# Altium PCB Micron-6_00_small border.PcbDoc
Units mm, origin at the board's own origin, x right, y up, seen from the top; angles counter-clockwise.
Board outline 41.92 x 18.62 mm, 2 copper layers (Top Layer, Bottom Layer), stack 1.571 mm thick; 74 components, 56 nets, 244 pads, 88 vias.
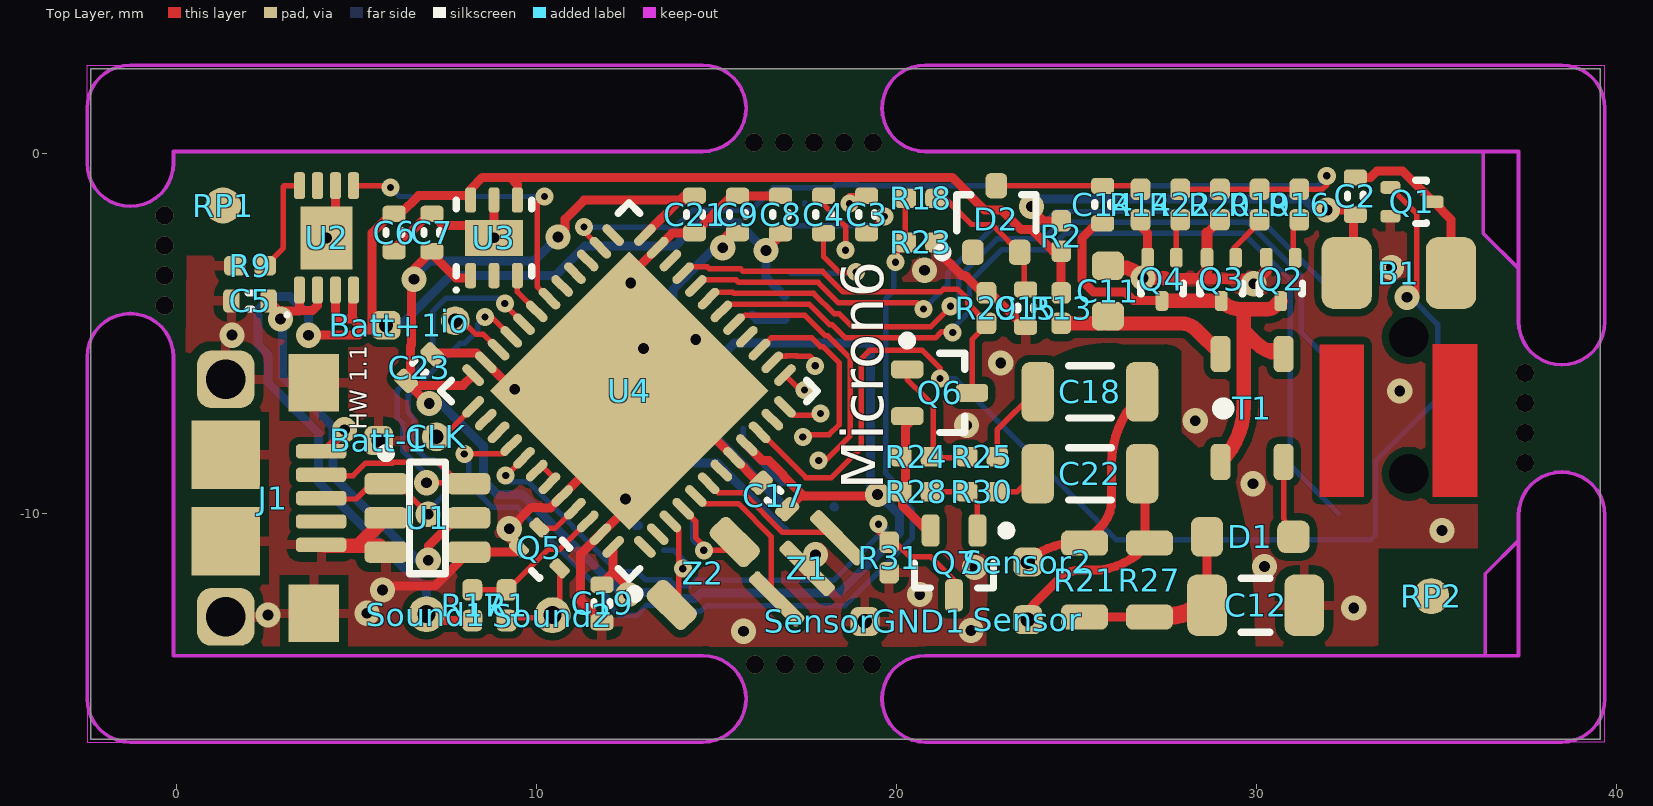
[diagram p0: Top Layer view]
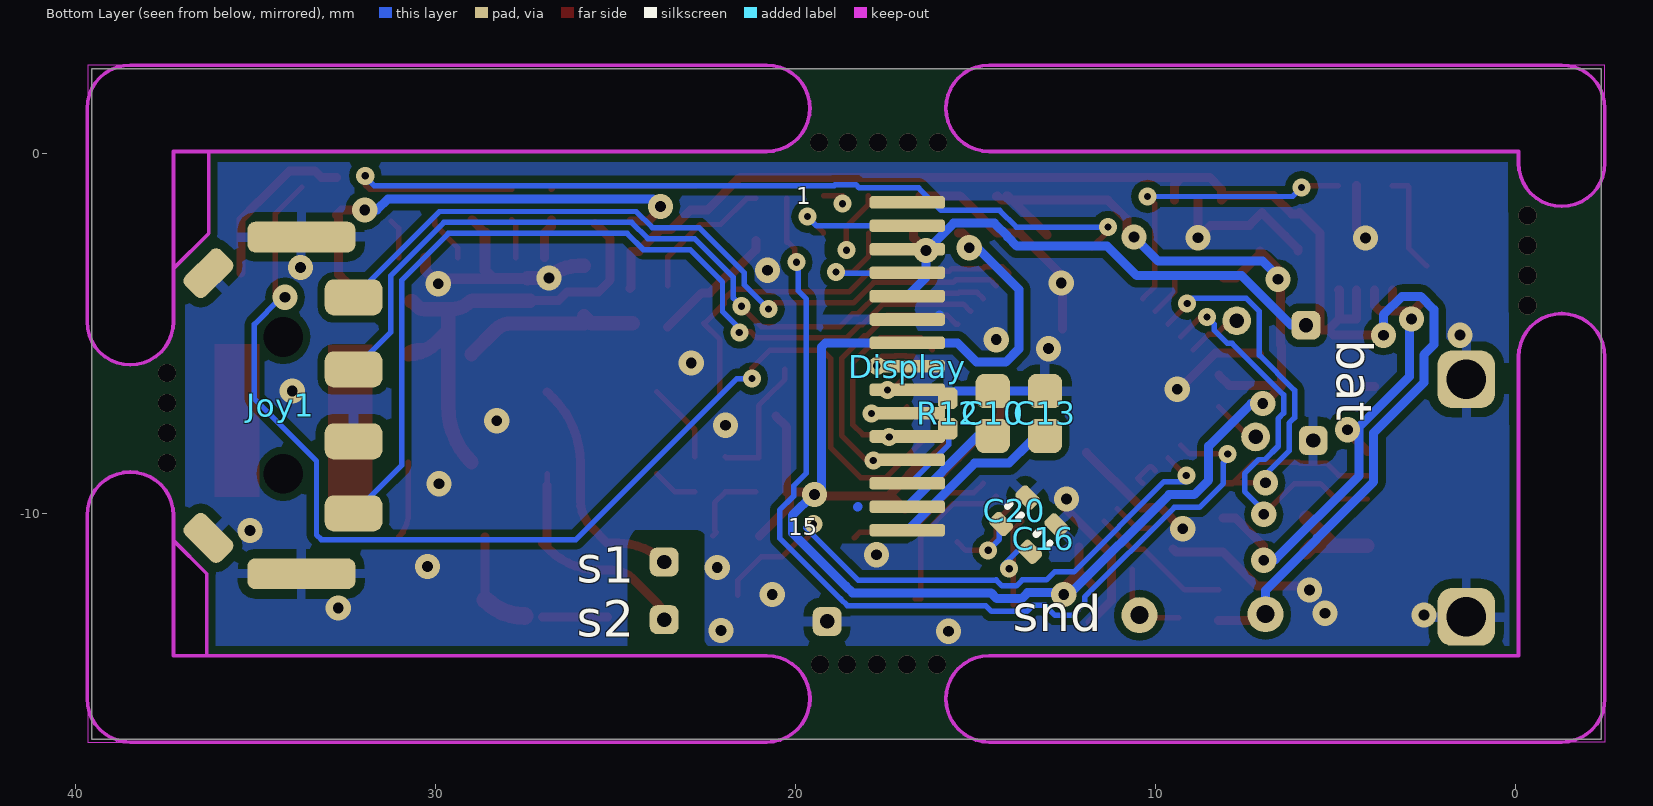
[diagram p1: Bottom Layer view, seen from below]

## Layer stack, top to bottom
Top Solder: solder mask 0.0102, Solder Resist, Dk 3.5
Top Layer: signal copper 0.0356
Dielectric1: dielectric 1.5, FR-4, Dk 4.8
Bottom Layer: signal copper 0.0356
Bottom Solder: solder mask 0.0102, Solder Resist, Dk 3.5

## Board outline
-2.375,-16.275 39.55,-16.275 39.55,2.35 -2.375,2.35
cut-out: 20.775,0.05 cw(c20.775,1.25) 20.775,2.45 39.65,2.45 39.65,-4.675 cw(c38.45,-4.675) 37.25,-4.675 37.25,-3.175 36.3,-2.225 36.3,0.05
cut-out: 20.775,-16.35 cw(c20.775,-15.15) 20.775,-13.95 36.35,-13.95 36.35,-11.675 37.25,-10.775 37.25,-10.05 cw(c38.45,-10.05) 39.65,-10.05 39.65,-16.35
cut-out: -2.475,-16.35 14.625,-16.35 ccw(c14.625,-15.15) 14.625,-13.95 -0.075,-13.95 -0.075,-5.65 ccw(c-1.275,-5.65) -2.475,-5.65
cut-out: -2.475,-0.275 -2.475,2.45 14.625,2.45 cw(c14.625,1.25) 14.625,0.05 -0.075,0.05 -0.075,-0.275 cw(c-1.275,-0.275)

## Design rules (kind name [scope] priority, off if disabled: settings)
BoardOutlineClearance [All] p1: gap=0.25
Clearance Clearance_NetD2_1 [InNet('NetD2_1')] p1: gap=0.3
Clearance Clearance_NetC1_2 [InNet('NetC1_2')] p2: gap=0.3
Clearance Clearance_NetC1_1 [InNet('NetC1_1')] p3: gap=0.2
Clearance Clearance_400V [InNet('+400V')] p4: gap=0.5
Clearance Clearance_poly [InPolygon] p5: gap=0.2
Clearance [All] p6: gap=0.152
ComponentClearance ComponentClearance_bot [OnLayer('Bottom Layer') and not (InComponent('Joy1') or InComponent('Display'))] p1: gap=0.5 collisioncheckmode=3 verticalgap=0.1 showdistances=TRUE
ComponentClearance [All] p2: gap=0.4 collisioncheckmode=3 verticalgap=0.1 showdistances=TRUE
HoleSize HoleSize_pw_ [InNet('pw_*') or InNet('GND')] p1: absolutevalues=TRUE maxlimit=2.54 minlimit=0.3 maxpercent=80.000 minpercent=20.000
HoleSize [All] p2: absolutevalues=TRUE maxlimit=2.54 minlimit=0.2 maxpercent=80.000 minpercent=20.000
HoleToHoleClearance [All] p1: gap=0.152 allowstackedmicrovias=TRUE
MinimumAnnularRing MinimumAnnularRing_pw_ [InNet('pw_*') or InNet('GND')] p1: minimumring=0.2
MinimumAnnularRing [InNet('*')] p2: minimumring=0.1
MinimumSolderMaskSliver [All] p1: minsoldermaskwidth=0.152
PlaneClearance [All] p1: clearance=2
PlaneConnect [All] p1: planeconnectstyle=Relief reliefexpansion=0.457 reliefentries=4 reliefconductorwidth=0.3 reliefairgap=0.457
PolygonConnect PolygonConnect_via [IsVia] p1: connectstyle=Direct reliefconductorwidth=0.254 reliefentries=4 polygonreliefangle="90 Angle" airgapwidth=0.254
PolygonConnect [All] p2: connectstyle=Relief reliefconductorwidth=0.254 reliefentries=4 polygonreliefangle="90 Angle" airgapwidth=0.254
RoutingVias [All] p1: holewidth=0.3 width=0.62 viastyle="Through Hole" minholewidth=0.3 minwidth=0.62 maxholewidth=6 maxwidth=4
ShortCircuit ShortCircuit_1 [All] p1: allowed=FALSE
ShortCircuit [All] p2: allowed=FALSE
SilkToSilkClearance [All] p1: silktosilkclearance=0.152
SilkToSolderMaskClearance SilkscreenOverComponentPads [IsPad] p1: minsilkscreentomaskgap=0.1 clearancetoexposedcopper=TRUE
SolderMaskExpansion [All] p1: expansion=0.05
Width Width_pw_ [InNet('pw_*') or InNet('GND')] p1: maxlimit=2.254 minlimit=0.25 preferedwidth=0.25
Width [All] p2: maxlimit=2.254 minlimit=0.152 preferedwidth=0.152
21 further rules are at their usual default settings.

## Components (designator, comment, footprint, x,y, rotation, side; value= is the part's Value field where it differs from the comment)
B1 "Vibro" "VIBRO 4HOBBY" 36.3,-9.725 r90 top
Batt+1 "" "SENSOR CONTACT"#1 6.2,-3 r270 top
Batt-1 "" "Sensor contact" 5.625,-7.975 r0 top
C2 "1uF" "0402 AVX CHK2" 32.742,-1.189 r270 top
C3 "1uF" "0402 AVX CHK2" 19.175,-1.7 r270 top
C4 "1uF" "0402 AVX CHK2" 17.98,-1.7 r270 top
C5 "1uF" "0402 AVX CHK2" 2.05,-4.1 r0 top
C6 "1uF" "0402 AVX CHK2" 6.05,-2.2 r90 top
C7 "1uF" "0402 AVX CHK2" 7.1,-2.2 r270 top
C8 "1uF" "0402 AVX CHK2" 16.784,-1.7 r270 top
C9 "1uF" "0402 AVX CHK2" 15.589,-1.7 r90 top
C10 "2.2uF" "YEGEO 0603" 14.525,-7.225 r90 bottom
C11 "10uF" 1608[0603] 25.875,-3.825 r270 top
C12 "4.7nF 630V" C1206 29.975,-12.55 r180 top
C13 "2.2uF" "YEGEO 0603" 13.075,-7.225 r90 bottom
C14 "10nF" "0402 AVX CHK2" 25.727,-1.425 r90 top
C15 "220pF" "0402 AVX CHK2" 23.587,-4.3 r270 top
C16 "10pF" "0402 AVX CHK2" 13.125,-10.7 r315 bottom
C17 "100nF" "0402 AVX CHK2" 16.6,-9.515 r135 top
C18 "10pF" CC1206JRNPOBBN100 25.375,-6.625 r0 top
C19 "100nF" "0402 AVX CHK2" 11.825,-12.5 r270 top
C20 "10pF" "0402 AVX CHK2" 13.925,-9.925 r315 bottom
C21 "100nF" "0402 AVX CHK2" 14.393,-1.7 r270 top
C22 "10pF" CC1206JRNPOBBN100 25.375,-8.9 r0 top
C23 "100nF" "0402 AVX CHK2" 6.75,-5.95 r45 top
CLK "" "SENSOR CONTACT"#2 7.225,-7.875 r180 top
D1 "DA2JF8100L" DA2JF8100L(CHK) 29.825,-10.65 r0 top
D2 "BAV99W" BAV99W 22.775,-1.825 r90 top
Display "UG-2832HSWEG04" "UG-2832HSWEG04 - DUPLICATE" 16.81,-5.925 r0 bottom locked
io "" "SENSOR CONTACT"#2 7.75,-4.65 r0 top
J1 "Micro-USB" 10118193-0001LF 1.375,-9.575 r270 top locked
Joy1 "SLLB510100" SLLB510100 33.225,-7 r90 bottom locked
Q1 "RUM002N05T2L" RUM002N05 34.317,-1.349 r0 top
Q2 "RUM002N05T2L" RUM002N05 30.675,-3.505 r270 top
Q3 "RUM002N05T2L" RUM002N05 29.025,-3.505 r270 top
Q4 "RUM002N05T2L" RUM002N05 27.375,-3.5 r270 top
Q5 "RUM002N05T2L" RUM002N05 10.225,-11.1 r315 top
Q6 "BC857CW" SOT323_L2 21.2,-6.65 r0 top
Q7 "BC857CW" SOT323_L2 21.6,-11.375 r270 top
R1 "150R" "0402 Yageo" 9.175,-12.55 r270 top
R2 "22R" "0402 Yageo" 24.575,-2.3 r90 top
R9 "20k" "0402 Yageo" 2.05,-3.125 r0 top
R12 "390K" "0402 Yageo" 15.775,-7.225 r270 bottom
R13 "22R" "0402 Yageo" 24.575,-4.3 r270 top
R14 "10k" "0402 Yageo" 26.779,-1.425 r90 top
R16 "470R" "0402 Yageo" 31.187,-1.425 r90 top
R17 "150R" "0402 Yageo" 8.225,-12.55 r90 top
R18 "196K" "0402 Yageo" 20.675,-1.25 r180 top
R19 "470R" "0402 Yageo" 30.085,-1.425 r90 top
R20 "10K" "0402 Yageo" 28.983,-1.425 r90 top
R21 "5.1M" "Vishay RCV0805" 25.225,-11.85 r270 top
R22 "470R" "0402 Yageo" 27.881,-1.425 r90 top
R23 "4.99k" "0402 Yageo" 20.675,-2.475 r0 top
R24 "470R" "0402 Yageo" 20.55,-8.425 r0 top
R25 "10k" "0402 Yageo" 22.375,-8.425 r180 top
R27 "5.1M" "VISHAY RCV0805" 27.025,-11.85 r270 top
R28 "470R" "0402 Yageo" 20.55,-9.4 r0 top
R29 "10k" "0402 Yageo" 22.5,-4.3 r90 top
R30 "10K" "0402 Yageo" 22.375,-9.4 r180 top
R31 "10k" "0402 Yageo" 19.8,-11.225 r270 top
RP1 "PR" "RP - minimum" 1.3,-1.45 r0 top
RP2 "PR" "RP - minimum" 34.85,-12.3 r90 top
Sensor "" "Sensor contact" 23.65,-12.95 r180 top
Sensor2 "" "Sensor contact" 23.65,-11.35 r90 top
SensorGND1 "" "Sensor contact" 19.125,-13 r0 top
Sound1 "" "SENSOR CONTACT"#3 6.95,-12.8 r90 top
Sound2 "" "SENSOR CONTACT"#3 10.45,-12.825 r90 top
T1 "ATB322515-0110" ATB322515-0110 30.75,-5.575 r270 top
U1 "USBLC6-4SC6" USBLC6-4 6.975,-10.125 r0 top
U2 "MCP73831-2ACI/MC" DFN-MC8 4.175,-2.35 r90 top
U3 "TPS780180300DRVT" TI-DRV6-1600X1000TP_V 8.825,-2.348 r90 top
U4 "STM32L152CBU6" STM32L152CBU6-SMALL 12.575,-6.6 r135 top
Z1 "CSTCE8M00G55-R0" CSTCE_G15C 17.522,-11.528 r225 top
Z2 "32,768 KHz" ABS07-120-32.768KHZ-T 14.675,-11.7 r45 top

## Footprints (in the part's own frame and the unit in brackets; to place one, negate y for a bottom-side part, rotate by r counter-clockwise, add the part's x,y. Pads: shape width x height; smd on the part's side, far side on the other; paste and mask are expansions set on the pad)
"0402 AVX CHK2" [mm]
  rrect50% 0.45x0.64 smd: 1(-0.52,0) 2(0.52,0)
  silkscreen extent -0.05,-0.22 0.05,0.22, body extent -0.55,-0.3 0.55,0.3, height 0.56
"0402 Yageo" [mm]
  rrect50% 0.6x0.55 smd: 1(-0.425,0) 2(0.425,0)
  body extent -0.53,-0.27 0.53,0.28, height 0.4
1608[0603] [mm] "Chip Capacitor, Body 1.6x0.8mm, IPC High Density"
  rrect50% 0.8x0.9 smd: 1(-0.7,0) 2(0.7,0)
  body extent -0.87,-0.48 0.87,0.48, height 1.3
10118193-0001LF [mm]
  rrect50% 0.4x1.4 smd: 1(-1.3,2.65) 2(-0.65,2.65) 3(0,2.65) 4(0.65,2.65) 5(1.3,2.65)
  rrect50% 1.6x1.6 hole 1.1: MH1(-3.3,0) MH1(3.3,0)
  rect 1.6x1.4 smd: MH1(-3.2,2.45) MH4(3.2,2.45)
  rect 1.9x1.9 smd: MH2(-1.2,0) MH3(1.2,0)
  body extent -3.93,-2.74 3.93,2.92, height 2.88
ABS07-120-32.768KHZ-T [mm]
  rrect50% 0.75x1.45 smd: 1(1.23,0.05) 2(-1.24,0.05)
  body extent -1.6,-0.7 1.6,0.8, height 0.9
ATB322515-0110 [mm]
  rrect50% 1x0.55 smd: 1(0,-1.75) 2(0,0) 3(3,0) 4(3,-1.75)
  silkscreen extent 1.5,-1.68 1.52,-1.66, body extent -0.1,-2.15 3.1,0.35, height 1.55
BAV99W [mm]
  rrect50% 0.7x0.6 smd: 1(-0.925,0.65) 2(-0.925,-0.65) 3(0.925,0)
  silkscreen extent -1.05,-1.1 0.67,1.62, body extent -1.12,-1.1 1.12,1.1, height 1.1
C1206 [mm] "Chip Capacitor, Body 3.2x1.6mm, IPC High Density"
  rrect50% 1.1x1.7 smd: 1(-1.35,0) 2(1.35,0)
  silkscreen extent -0.4,-0.75 0.4,0.75, body extent -1.6,-0.81 1.6,0.79, height 1.6
CC1206JRNPOBBN100 [mm]
  rrect50% 0.9x1.65 smd: 1(-1.45,0) 2(1.45,0)
  silkscreen extent -0.6,-0.72 0.6,0.72, body extent -1.75,-0.8 1.75,0.8, height 0.7
CSTCE_G15C [mm]
  rrect50% 0.4x1.9 smd: 1(-1.2,0) 2(1.2,0) 3(0,0)
  body extent -1.6,-0.65 1.6,0.65, height 0.7
DA2JF8100L(CHK) [mm] "SODFL, 2-Leads, Body 1,25x2,50mm, IPC Medium Density"
  rrect50% 0.9x1.1 smd: 1(-1.2,0)
  rrect50% 0.9x0.9 smd: 2(1.2,0)
  body extent -0.9,-0.67 0.9,0.67, height 0.8
DFN-MC8 [mm] "SON, 8-Leads, Body 2x3mm, Pitch 0.5mm, Microchip Recommended"
  rrect50% 0.75x0.3 smd: 1(-1.45,0.75) 2(-1.45,0.25) 3(-1.45,-0.25) 4(-1.45,-0.75) 5(1.45,-0.75) 6(1.45,-0.25) 7(1.45,0.25) 8(1.45,0.75)
  rect 1.75x1.45 smd: 9(0,0)
  silkscreen extent -2.18,1.05 -2.09,1.15, body extent -1.55,-1.05 1.55,1.05, height 1
"RP - minimum" [mm]
  round 1 smd paste-2 mask+0.5: 0(0,0)
RUM002N05 [mm] "SOTFL, 3-Leads, Body 1,20x1,20mm, Pitch 0,40mm, IPC Medium Density"
  rrect50% 0.55x0.35 smd: 1(-0.6,0.4) 2(-0.6,-0.4) 3(0.6,0)
  silkscreen extent 0.1,-0.6 0.4,0.6, body extent -0.53,-0.63 0.52,0.63, height 0.45
"SENSOR CONTACT"#1 [mm]
  rrect50% 0.8x0.8 hole 0.4: 1(1.775,-0.375)
"SENSOR CONTACT"#2 [mm]
  round 0.8 hole 0.4: 1(0,0)
"SENSOR CONTACT"#3 [mm]
  round 1 hole 0.5: 1(0,0)
"Sensor contact" [mm]
  rrect50% 0.8x0.8 hole 0.4: 1(0,0)
SLLB510100 [mm]
  rrect50% 0.85x3 smd: 0(-4.675,0.5) 0(4.675,0.5)
  rrect50% 1.4x0.8 smd rot 45: 0(-3.68,3.08)
  rrect50% 1x1.6 smd: 0(-1,-0.95) 1(-3,-0.95) 2(1,-0.95) 3(3,-0.95)
  rrect50% 1.4x0.8 smd rot 135: 0(3.67,3.08)
  rrect50% 0x0 hole 1.1 unplated: 5(-1.9,1) 5(1.9,1)
  body extent -6.62,-1.4 6.64,7.6, height 2.2
SOT323_L2 [mm] "SOT323, 3-Leads, Body 2.0x1.3mm, Pitch 0.65mm, Lead Span 2.1mm, IPC High Density"
  rrect50% 0.9x0.5 smd: 1(-0.9,0.65) 2(-0.9,-0.65) 3(0.9,0)
  silkscreen extent -1.02,-1.1 0.7,1.57, body extent -1.12,-1.1 1.12,1.1, height 1.1
STM32L152CBU6-SMALL [mm] "QFN, 48-Leads, Body 7,00x7,00mm, Pitch 0,50mm, Thermal Pad 5,60x5,60mm, IPC High Density"
  oval 0.75x0.25 smd: 1(-3.375,2.75) 2(-3.375,2.25) 3(-3.375,1.75) 4(-3.375,1.25) 5(-3.375,0.75) 6(-3.375,0.25) 7(-3.375,-0.25) 8(-3.375,-0.75) 9(-3.375,-1.25) 10(-3.375,-1.75) 11(-3.375,-2.25) 12(-3.375,-2.75) 25(3.375,-2.75) 26(3.375,-2.25) 27(3.375,-1.75) 28(3.375,-1.25) 29(3.375,-0.75) 30(3.375,-0.25) 31(3.375,0.25) 32(3.375,0.75) 33(3.375,1.25) 34(3.375,1.75) 35(3.375,2.25) 36(3.375,2.75)
  oval 0.25x0.75 smd: 13(-2.75,-3.375) 14(-2.25,-3.375) 15(-1.75,-3.375) 16(-1.25,-3.375) 17(-0.75,-3.375) 18(-0.25,-3.375) 19(0.25,-3.375) 20(0.75,-3.375) 21(1.25,-3.375) 22(1.75,-3.375) 23(2.25,-3.375) 24(2.75,-3.375) 37(2.75,3.375) 38(2.25,3.375) 39(1.75,3.375) 40(1.25,3.375) 41(0.75,3.375) 42(0.25,3.375) 43(-0.25,3.375) 44(-0.75,3.375) 45(-1.25,3.375) 46(-1.75,3.375) 47(-2.25,3.375) 48(-2.75,3.375)
  rect 3.05x3.05 smd paste-0.5: 49(-1.21,1.21) 49(-1.21,-1.22) 49(1.21,1.21) 49(1.21,-1.22)
  silkscreen extent -4.21,-3.7 3.7,4, body extent -3.51,-3.51 3.51,3.51, height 0.78
TI-DRV6-1600X1000TP_V [mm] "SON, 6-Leads, Body 2x2mm, Pitch 0.65mm, Thermal Pad 1X1.6mm"
  rrect50% 0.7x0.3 smd: 1(-1.05,0.65) 2(-1.05,0) 3(-1.05,-0.65) 4(1.05,-0.65) 5(1.05,0) 6(1.05,0.65)
  rect 1x1.6 smd: 7(0,0)
  silkscreen extent -1.5,-1.05 1.05,1.1, body extent -1,-1 1,1, height 0.8
"UG-2832HSWEG04 - DUPLICATE" [mm]
  rrect50% 2.1x0.35 smd paste-4: 1(0.09,-4.56) 2(0.09,-3.91) 3(0.09,-3.26) 4(0.09,-2.61) 5(0.09,-1.96) 6(0.09,-1.31) 7(0.09,-0.66) 8(0.09,-0.01) 9(0.09,0.64) 10(0.09,1.29) 11(0.09,1.94) 12(0.09,2.59) 13(0.09,3.24) 14(0.09,3.89) 15(0.09,4.54)
  body extent -16.81,-5.82 14.8,5.8, height 2.71
USBLC6-4 [mm]
  rrect50% 1.2x0.6 smd: 1(-1.15,0.95) 2(-1.15,0) 3(-1.15,-0.95) 4(1.15,-0.95) 5(1.15,0) 6(1.15,0.95)
  silkscreen extent -1.27,-1.55 0.5,1.92, body extent -1.6,-1.53 1.6,1.53, height 1.45
"VIBRO 4HOBBY" [mm] "EBAY zxdima"
  rrect50% 2x1.4 smd: 1(6.4,3.8) 2(6.4,0.9)
  Top Layer region: 0.18,3.31 4.42,3.31 4.42,4.55 0.18,4.55
  Top Layer region: 0.18,0.17 4.43,0.17 4.43,1.41 0.18,1.41
  body extent -3.44,0.21 7.36,4.51, height 3.6
"Vishay RCV0805" [mm]
  rrect50% 0.7x1.3 smd: 1(-1.025,0) 2(1.025,0)
  body extent -1.1,-0.7 1.1,0.7, height 0.5
"VISHAY RCV0805" [mm]
  rrect50% 0.7x1.3 smd: 1(-1.025,0) 2(1.025,0)
  body extent -1.1,-0.7 1.1,0.7, height 0.5
"YEGEO 0603" [mm]
  rrect50% 0.95x0.95 smd: 1(-0.625,0) 2(0.625,0)
  body extent -0.85,-0.45 0.85,0.45, height 0.8

## Part data
B1: library part Motor, "Motor, General Kind"
Batt+1 Batt-1 CLK io Sensor Sensor2 SensorGND1 Sound1 Sound2: library part Plug, "Plug"
C2 C3 C4 C6 C7 C8 C9 C10 C13: library part CAPACITOR, "Capacitor (Semiconductor SIM Model)"
C5 C11 C12 C14 C15 C16 C17 C18 C19 C20 C21 C22 C23: library part "Cap Semi", "Capacitor (Semiconductor SIM Model)"
D1: library part Diode, "Diode"
D2: library part BAV99, "Silicon Switching Diode Array for High-Speed Switching"
J1: library part 0481900001, "USB On-The-Go (OTG) Mini-B Receptacle, Right Angle, SMT, 0.80mm (.031\") Pitch, Solder Tabs with Back Cover, Recessed Type"
Joy1: library part Joystik
Q1 Q2 Q3 Q4 Q5: library part IRLML2402, "HEXFET Power MOSFET"
Q6 Q7: "PNP General-purpose Transistor"
R1 R2 R9 R12 R13 R14 R16 R17 R18 R19 R20 R21 R22 R23 R24 R25 R27 R28 R29 R30 R31: library part "Resistor 0805"
U2: library part MCP73832T-2ACI/MC, "=Order"
U3: "Single Output LDO, 150 mA, Fixed 1.8, 3.0 V Output, 2.2 to 5.5 V Input, with Pin-Selectable, 6-pin SON (DRV), -40 to 125 degC, Green (RoHS & no Sb/Br)"
Z1: library part 8MHZ_cap
Z2: library part 8MHZ

## Via types
v1: diameter 0.7, hole 0.3, Top Layer to Bottom Layer, tented both sides, 45 vias
v2: diameter 0.5, hole 0.2, Top Layer to Bottom Layer, tented both sides, 25 vias
v3: diameter 0.5, hole 0.5, Top Layer to Bottom Layer, tented both sides, 18 vias

## Nets (pads, with @x,y where several pads share a name; then routed paths per layer and width w, separated by ;. In a path a pad name is that pad's centre, name@x,y a point inside that pad or via, vN(x,y) a via of type N, cw(c..) or ccw(c..) an arc to the next point about the centre after c; other vN are vias at no path point)
+DATA: J1.3 U1.1 U4.33 | length 11.6
  Top Layer w0.152: J1.3@4.125,-9.6 5,-9.6 5.425,-9.175 U1.1 6.15,-9.175 v1(7,-10.025) ; v2(8.575,-4.55) 8.757,-4.55 U4.33
  Bottom Layer w0.152: v1(7,-10.025) 7,-9.919 7.529,-9.39 7.529,-8.892 7.14,-8.503 6.965,-8.503 6.597,-8.135 6.597,-7.365 6.447,-7.215 6.447,-6.711 7.879,-5.278 8.01,-5.278 8.378,-4.91 8.378,-4.747 v2(8.575,-4.55)
-DATA: J1.2 U1.6 U4.32 | length 13.9
  Top Layer w0.152: J1.2@4.125,-8.95 4.915,-8.95 5.261,-8.603 6.002,-8.603 6.031,-8.575 7.275,-8.575 U1.6@7.85,-9.15 ; v1(6.95,-9.15) U1.6@7.85,-9.15 ; U1.6@7.875,-9.175 U1.6 8.1,-9.15 U1.6@7.85,-9.15 ; v2(9.125,-4.175) 9.125,-4.211 U4.32
  Bottom Layer w0.152: v1@6.9,-9.05 6.9,-8.87 6.292,-8.261 6.292,-7.491 6.143,-7.341 6.143,-6.585 7.122,-5.606 7.122,-4.39 7.49,-4.022 8.972,-4.022 v2(9.125,-4.175)
"BAT VOLTAGE": R1.1 R17.2 U4.46 | length 4
  Top Layer w0.152: R17.2@8.25,-12.125 9.2,-12.125 10.335,-10.99 10.66,-10.99 U4.46
BATT_STAT: U2.5 U4.30 | length 8.5
  Top Layer w0.152: U2.5 v2@5.95,-0.9 ; v2(10.225,-1.2) 10.022,-1.403 10.022,-3.694 U4.30
  Bottom Layer w0.152: v2(5.95,-0.95) 6.2,-1.2 v2(10.225,-1.2)
CLK: CLK.1 U4.37 | length 1.4
  Top Layer w0.152: CLK.1@7.125,-7.675 7.175,-7.725 7.561,-7.725 U4.37
CS#: Display.8 U4.14 | length 1.5
  Top Layer w0.152: U4.14 16.727,-5.63 16.934,-5.63 16.936,-5.628 17.229,-5.628 17.231,-5.63 17.598,-5.63 v2@17.87,-5.902
  other v2: 17.745,-5.902
D/C#: Display.10 U4.12 | length 1.2
  Top Layer w0.152: U4.12 17.139,-7.275 17.844,-7.275 v2(17.891,-7.228)
  Bottom Layer w0.152: Display.10@17.85,-7.187 v2(17.891,-7.228)
GND: Batt-1.1 C5.1 C6.1 C7.1 C8.1 C9.2 C10.2 C11.1 C12.1 C13.2 C15.2 C16.1 C17.2 C19.2 C20.1 C21.2 C23.2 Display.6 J1.5 J1.MH1 J1.MH2 J1.MH3 J1.MH4 Joy1.0 Q1.2 Q2.2 Q3.2 Q4.2 Q5.2 R9.1 R12.1 R14.1 R20.1 R23.2 R29.2 R31.2 SensorGND1.1 U1.2 U1.3 U1.4 U2.6 U2.9 U3.5 U3.7 U4.8 U4.23 U4.35 U4.44 U4.47 U4.49 Z1.3 | length 48.7
  Top Layer w0.25: J1.MH1@3.925,-6.475 J1.MH1@4.162,-6.475 ; U2.9@4.425,-2.1 U2.6 ; Batt-1.1@5.425,-7.975 Batt-1.1@5.562,-7.975 ; Batt-1.1@5.562,-7.876 Batt-1.1@5.562,-7.975 ; Batt-1.1 Batt-1.1@5.562,-7.975 ; v1(5.725,-12.125) 5.827,-12.023 7.177,-12.023 U1.4 9.426,-11.075 Q5.2@9.518,-10.984 ; C6.1 6.05,-2.65 6.4,-2.3 7.05,-1.65 7.4,-2 8.477,-2 v1(8.825,-2.348) U3.5 ; C23.2 7.15,-5.55 8.343,-5.55 U4.35 U4.49@9.318,-6.525 ; v1(9.25,-10.425) 9.27,-10.425 9.862,-9.834 10.164,-9.834 10.176,-9.846 10.39,-9.846 U4.49@11.924,-8.311 ; C19.2 11.228,-12.423 11.228,-11.129 U4.49@12.575,-9.782 ; U4.49@12.582,-4.882 12.582,-3.411 U4.23 13.773,-2.22 C21.2 15.433,-1.18 C9.2 C8.1@16.55,-1.18 ; U4.49@14.293,-6.593 14.293,-7.258 U4.8 C17.2@16.181,-9.145 ; R23.2@21.1,-2.425 21.1,-2.679 21.814,-3.393 21.896,-3.393 22.377,-3.875 22.605,-3.875 C15.2@23.55,-4.82 ; R14.1 26.779,-2.029 26.975,-2.225 Q4.2 ; 28.625,-2.208 R20.1
  Top Layer w0.3: 27.45,-3.473 27.455,-3.477 28.403,-3.477 ; 28.625,-2.208 Q3.2 28.625,-3.256 28.403,-3.477 ; Q2.2 30.275,-3.256 30.049,-3.482 28.408,-3.482 28.403,-3.477
  Top Layer w0.4: J1.5@4.125,-10.9 5.05,-10.9 ; U1.3 5.65,-10.9 5.05,-10.9 ; U1.2 5.05,-10.9 ; C11.1 26.031,-3.125 cw(c26.031,-4.284) v1(26.85,-3.464) 27.442,-3.464 27.45,-3.473
  Bottom Layer w0.25: C16.1 C16.1@12.843,-10.332 ; C13.2@13.125,-6.6 C10.2 15.55,-6.6 R12.1@15.75,-6.8 ; Display.6@16,-4.495 16.12,-4.615 Display.6
  other v1: 15.75,-13.275 22.075,-13.25 2.55,-12.825 5.3,-12.775 32.7,-12.625 20.65,-12.25 22.175,-11.5 30.225,-11.475 17.75,-11.15 35.15,-10.475 12.475,-9.6 29.9,-9.175 21.95,-7.55 28.3,-7.425 33.975,-6.6 9.4,-6.55 22.9,-5.825 12.975,-5.425 14.425,-5.175 1.55,-5.05 29.925,-3.625 12.625,-3.6 20.776,-3.25 33.75,-3.175 4.175,-2.35
"HV PUMP": R16.2 R19.2 R20.2 R22.2 U4.26 | length 26.5
  Top Layer w0.152: v2@11.325,-2.168 U4.26 ; R22.2 R20.2 R19.2 ; R19.2@29.825,-1 R16.2 31.192,-0.996 31.831,-0.996 31.95,-0.877 v2(31.95,-0.625)
  Bottom Layer w0.152: v2(11.325,-2.05) 13.867,-2.05 14.334,-1.584 15.962,-1.584 16.584,-0.962 18.238,-0.962 18.328,-0.872 18.899,-0.872 18.924,-0.897 31.704,-0.897 31.95,-0.651 v2(31.95,-0.625)
HVDETECT: R18.2 R23.1 U4.40 | length 28.4
  Top Layer w0.152: v2@7.962,-8.349 7.961,-8.35 7.96,-8.349 9.058,-8.349 U4.40 ; v2@20.025,-2.95 20.025,-2.65 R23.1@20.25,-2.425 ; R23.1 R23.1@20.25,-2.425 ; R18.2@20.25,-1.475 R23.1@20.25,-2.425 ; R18.2 R23.1@20.25,-2.425
  Bottom Layer w0.152: v2(8,-8.349) 7.93,-8.349 7.9,-8.379 8.122,-8.6 8.122,-9.167 8.786,-9.831 9.481,-9.831 11.972,-12.322 11.972,-12.49 12.311,-12.829 12.79,-12.829 13.064,-12.555 13.412,-12.555 13.577,-12.72 14.559,-12.72 14.72,-12.559 18.56,-12.559 18.748,-12.372 18.759,-12.372 20.441,-10.69 20.441,-9.91 20.054,-9.524 20.054,-9.236 19.7,-8.882 19.7,-4.048 19.925,-3.823 19.925,-3.125 20.001,-3.049 v2@19.977,-3.025 ; v2(19.976,-3.025) 19.976,-2.999 v2@20.025,-2.95
"IMPULSE 1": Q7.3 R31.1 U4.41 | length 16.9
  Top Layer w0.152: v2@9.1,-9.014 U4.41 ; v2(19.5,-10.3) 19.5,-10.5 R31.1 19.967,-10.8 20.369,-11.202 20.95,-11.202 21.6,-11.852 Q7.3
  Bottom Layer w0.152: v2@9.2,-9.051 9.15,-9.1 9.168,-9.118 9.768,-9.118 12.273,-11.623 12.81,-11.623 13.035,-11.848 13.704,-11.848 13.87,-12.014 14.266,-12.014 14.431,-11.848 14.435,-11.852 18.267,-11.852 19.723,-10.397 19.597,-10.397 v2(19.5,-10.3)
  other v2: 9.15,-8.95
"IMPULSE 2": Q6.3 R29.1 U4.21 | length 11.4
  Top Layer w0.152: U4.21 14.254,-3.153 14.754,-3.153 14.803,-3.202 15.664,-3.202 15.741,-3.279 17.954,-3.279 18.522,-3.847 21.227,-3.847 21.304,-3.769 21.701,-3.769 21.981,-4.049 21.981,-4.173 22.533,-4.725 22.55,-4.725 22.1,-5.175 Q6.3
IO: io.1 U4.34 | length 1.5
  Top Layer w0.152: io.1 7.943,-4.65 8.321,-5.028 8.529,-5.028 U4.34
NetC3_1: C3.1 Display.1 | length 0.8
  Top Layer w0.152: v2@18.701,-1.405 18.701,-1.35 18.701,-1.227 18.675,-1.201 18.696,-1.18 C3.1@19.225,-1.18
  Bottom Layer w0.152: Display.1@17.451,-1.414 Display.1@17.451,-1.375
  other v2: 18.701,-1.4
NetC3_2: C3.2 Display.2 | length 3.5
  Top Layer w0.152: C3.2@19.225,-2.22 19.225,-2.205 v2(19.673,-1.757)
  Bottom Layer w0.152: Display.2 19.415,-2.015 v2(19.673,-1.757)
NetC4_1: C4.1 Display.3 | length 1.7
  Top Layer w0.152: C4.1 17.98,-1.418 18.588,-2.027 v2@18.588,-2.665
  other v2: 18.588,-2.69
NetC4_2: C4.2 Display.4 | length 3.4
  Top Layer w0.152: C4.2@17.975,-2.22 17.975,-2.87 18.406,-3.3 v2(18.876,-3.3)
  Bottom Layer w0.152: Display.4@17.06,-3.325 v2@18.751,-3.325
NetC14_2: C14.2 D2.3 R14.2 | length 4.1
  Top Layer w0.152: D2.3 22.775,-0.897 26.676,-0.897 R14.2
NetC15_1: C15.1 D2.2 R18.1 | length 3.9
  Top Layer w0.152: R18.1 21.356,-1.25 22.083,-1.977 22.652,-1.977 23.55,-2.875 C15.1@23.55,-3.68
NetC16_2: C16.2 U4.3 Z2.2 | length 3.8
  Top Layer w0.152: U4.3 13.95,-10.45 13.95,-12.541 Z2.2 ; v2@14,-11.475 14.06,-11.535 v2(14.068,-11.535)
  Bottom Layer w0.152: C16.2@13.543,-11.018 13.812,-11.018 14.235,-11.44 14.14,-11.535 v2(14.068,-11.535)
NetC18_1: C18.1 R25.1 | length 2.2
  Top Layer w0.152: R25.1 22.8,-7.675 C18.1@23.85,-6.625
NetC18_2: C18.2 R21.1 Sensor2.1 | length 6.5
  Top Layer w0.25: Sensor2.1 cw(c24.917,-12.617) 24.619,-10.85 cw(c24.917,-12.617) 24.917,-10.825 R21.1 25.664,-10.386 ccw(c24.902,-9.625) 25.979,-9.625 25.979,-8.598 cw(c28.519,-8.598) 26.723,-6.802 C18.2@26.9,-6.625
NetC20_2: C20.2 U4.4 Z2.1 | length 3.3
  Top Layer w0.152: U4.4 14.425,-10.218 14.425,-10.675 14.65,-10.9 v2(14.65,-11.025) 15.279,-11.025 Z2.1 Z2.1@15.509,-10.782
  Bottom Layer w0.152: C20.2@14.343,-10.243 14.343,-10.718 v2(14.65,-11.025)
NetC22_1: C22.1 R30.1 | length 1.3
  Top Layer w0.152: R30.1 23.35,-9.4 C22.1@23.85,-8.9
NetC22_2: C22.2 R27.1 Sensor.1 | length 6.3
  Top Layer w0.152: C22.2@26.9,-9.225 C22.2@26.9,-8.9
  Top Layer w0.25: C22.2@26.9,-9.225 R27.1@26.9,-10.95 ; R27.1 R27.1@26.9,-10.95 ; Sensor.1@23.65,-12.938 cw(c24.285,-12.95) 23.836,-12.501 23.983,-12.354 24.525,-11.812 cw(c25.091,-12.378) 25.091,-11.577 25.45,-11.577 ccw(c25.45,-9.591) 26.854,-10.996 R27.1@26.9,-10.95 ; Sensor.1@23.65,-12.938 ccw(c24.285,-12.95) Sensor.1 Sensor.1@23.65,-12.938
NetD1_2: D1.2 T1.3 | length 2.3
  Top Layer w0.152: T1.3 30.75,-9.986 ccw(c31.689,-9.986) D1.2 ; D1.2@30.894,-10.519 D1.2
NetDisplay_13: Display.13 R12.2 | length 2
  Bottom Layer w0.152: R12.2@15.75,-7.65 15.75,-8.096 16.819,-9.165 Display.13
NetJoy1_1: Joy1.1 U4.18 | length 25.6
  Top Layer w0.152: U4.18 15.337,-4.192 17.575,-4.192 18.143,-4.76 18.218,-4.76 18.583,-5.125 21.079,-5.125 21.254,-4.95 21.55,-4.95 21.562,-4.962 v2(21.562,-4.973)
  Bottom Layer w0.152: v2(21.562,-4.973) 21.562,-4.865 22.029,-4.397 22.029,-3.575 22.929,-2.675 24.23,-2.675 24.68,-2.225 29.639,-2.225 30.942,-3.528 30.942,-8.667 Joy1.1
NetJoy1_2: Joy1.2 U4.19 | length 22.1
  Top Layer w0.152: U4.19 14.961,-3.86 15.461,-3.86 15.489,-3.887 17.701,-3.887 18.269,-4.455 18.411,-4.455 18.776,-4.821 20.953,-4.821 21.5,-4.274 v2@21.502,-4.274
  Bottom Layer w0.152: v2(21.502,-4.248) 21.725,-4.025 21.725,-3.448 22.803,-2.371 24.104,-2.371 24.554,-1.921 29.765,-1.921 31.247,-3.402 31.247,-4.972 Joy1.2
NetJoy1_3: Joy1.3 U4.20 | length 20.6
  Top Layer w0.152: U4.20 14.608,-3.507 15.538,-3.507 15.615,-3.583 17.827,-3.583 18.396,-4.151 20.576,-4.151 v2(20.75,-4.325)
  Bottom Layer w0.152: v2(20.75,-4.325) 20.75,-4.323 21.421,-3.653 21.421,-3.322 22.677,-2.066 23.978,-2.066 24.428,-1.616 29.891,-1.616 Joy1.3
NetQ2_1: Q2.1 R16.1 | length 1.1
  Top Layer w0.152: Q2.1@31.025,-2.905 31.025,-2.087 R16.1@31.225,-1.888
NetQ3_1: Q3.1 R19.1 | length 1.3
  Top Layer w0.152: Q3.1@29.375,-2.905 29.375,-2.625 30.02,-1.98 R19.1@30.02,-1.85
NetQ4_1: Q4.1 R22.1 | length 1.1
  Top Layer w0.152: Q4.1 27.775,-1.956 R22.1
NetQ5_1: Q5.1 U4.45 | length 1.2
  Top Layer w0.152: Q5.1@10.084,-10.418 10.525,-10.418 U4.45
NetQ5_3: Q5.3 R1.2 Sound2.1 | length 2.5
  Top Layer w0.152: R1.2@9.354,-12.9 10.375,-12.9 Sound2.1 10.649,-12.626 Q5.3@10.649,-11.549
NetQ6_1: Q6.1 R24.2 R25.2 | length 3.7
  Top Layer w0.152: Q6.1 20.3,-6.281 20.792,-6.773 21.027,-7.008 21.027,-7.592 21.027,-8.45 21.925,-8.45 R25.2
NetQ7_1: Q7.1 R28.2 R30.2 | length 2.2
  Top Layer w0.152: R28.2@21.1,-9.4 R30.2 22.25,-9.7 Q7.1 ; Q7.1@22.2,-10.525 Q7.1@22.3,-10.625
NetR9_2: R9.2 U2.8 | length 2.9
  Top Layer w0.152: R9.2 2.975,-2.625 2.975,-0.925 3,-0.9 U2.8
NetU4_5: U4.5 Z1.2 | length 4.4
  Top Layer w0.152: U4.5 14.645,-9.73 15.609,-9.73 16.522,-10.643 16.522,-12.376 Z1.2
NetU4_6: U4.6 Z1.1 | length 4.2
  Top Layer w0.152: U4.6 15.047,-9.426 15.735,-9.426 16.837,-10.528 18.219,-10.528 Z1.1
POWERUP: U3.3 U4.31 | length 1.2
  Top Layer w0.152: U3.3 9.475,-3.848 10.012,-4.385 U4.31
PROTECT_NET: U4.42 U4.43 | length 0.9
  Top Layer w0.152: U4.42 10.121,-8.7 10.171,-8.7 10.5,-9.029 U4.43
PW_1: B1.1 C2.2 R2.2 | length 12.2
  Top Layer w0.25: v1@23.751,-1.525 23.751,-1.551 24.075,-1.875 R2.2 ; v1(31.965,-1.574) 32.608,-1.574 C2.2 32.689,-1.763 32.689,-3.361 B1.1@32.5,-3.55
  Bottom Layer w0.25: v1(23.751,-1.475) 23.963,-1.263 31.314,-1.263 31.626,-1.574 v1(31.965,-1.574)
PW_2: B1.2 C2.1 Q1.3 | length 4.8
  Top Layer w0.25: C2.1 33.168,-0.669 33.34,-0.497 34.055,-0.497 34.908,-1.349 Q1.3 35.4,-1.832 B1.2
PW_5: C10.1 Display.14 | length 3.2
  Bottom Layer w0.25: C10.1 14.935,-7.85 Display.14 ; 18.265,-9.815 18.275,-9.825
PW_6: C13.1 Display.15 | length 4.9
  Bottom Layer w0.25: C13.1@13.125,-7.85 13.316,-7.85 13.754,-8.288 13.76,-8.288 14.074,-8.602 15.027,-8.602 16.89,-10.465 Display.15
PW_7: C11.2 R13.2 T1.1 | length 5.1
  Top Layer w0.4: R13.2@24.525,-4.725 25.675,-4.725 C11.2 25.875,-4.727 27.925,-4.727 cw(c27.925,-5.276) 28.313,-4.888 T1.1
PW_8: C14.1 Q2.3 Q3.3 Q4.3 T1.2 T1.4 | length 14.8
  Top Layer w0.25: C14.1@25.568,-1.945 25.148,-2.365 25.148,-3.523 25.472,-3.848 26.346,-3.848 26.59,-4.092 27.367,-4.092 Q4.3
  Top Layer w0.4: Q4.3 Q3.3@28.97,-4.1 ; T1.4 ccw(c27.431,-7.006) 29.65,-7.006 29.65,-4.539 ccw(c29.351,-4.539) 29.563,-4.327 ; Q3.3 ccw(c29.563,-3.567) 29.563,-4.327 ; 29.65,-4.925 29.982,-5.257 ccw(c30.75,-4.489) T1.2 ; Q2.3 ccw(c30.675,-4.177) 30.624,-4.126 30.5,-4.25 cw(c30.313,-4.063) 30.313,-4.327 29.563,-4.327 ; 30.295,-5.475 ccw(c30.75,-4.489) T1.2 ; 30.295,-5.475 ccw(c30.75,-4.489) T1.2 ; 30.295,-5.475 30.509,-5.475 cw(c30.509,-5.816) T1.2
PW_+3V: C7.2 C9.1 C17.1 C19.1 C21.1 C23.1 Display.7 Q6.2 Q7.2 R24.1 R28.1 U3.1 U4.9 U4.24 U4.36 U4.48 | length 61.6
  Top Layer w0.25: v1@6.525,-3.295 C7.2 7.1,-2.795 7.773,-3.468 8.105,-3.468 U3.1 ; C23.1@6.532,-6.443 7.959,-6.443 U4.36 ; v1(6.6,-3.5) 6.532,-3.568 6.532,-5.323 6.502,-5.354 6.502,-6.452 7,-6.95 v1(7.025,-6.95) ; v1(10.601,-2.325) 10.798,-2.128 10.798,-1.832 11.329,-1.3 13.986,-1.3 ; C19.1@11.768,-11.996 12.133,-11.631 ; U4.48 12.133,-11.631 ; v1@12.51,-12.008 12.133,-11.631 ; U4.24 13.986,-1.3 ; C21.1@14.425,-1.2 14.405,-1.18 C21.1 14.273,-1.3 14.023,-1.3 14.143,-1.18 14.106,-1.18 13.986,-1.3 ; v1@15.076,-2.624 15.054,-2.624 15.005,-2.575 15.359,-2.22 C9.1@15.475,-2.22 ; U4.9 16.274,-8.531 16.461,-8.531 16.848,-8.918 16.848,-8.935 17.431,-9.517 ; C17.1 17.333,-9.517 17.431,-9.517 ; v1@19.484,-9.517 17.431,-9.517 ; v1@19.601,-9.4 R28.1 20.162,-9.4 20.162,-9.787 Q7.2@21,-10.625 ; R28.1@20.25,-9.4 20.25,-8.425 20.25,-7.6 Q6.2@20.55,-7.3
  Bottom Layer w0.25: v1@6.525,-3.5 7.027,-2.998 9.928,-2.998 v1(10.601,-2.325) ; v1(7.025,-6.95) 7.347,-6.95 8.527,-8.131 8.527,-9.073 8.932,-9.478 9.628,-9.478 12.4,-12.251 v1(12.551,-12.251) 12.6,-12.202 13.558,-12.202 13.723,-12.367 14.412,-12.367 14.573,-12.206 18.414,-12.206 18.601,-12.018 18.613,-12.018 20.087,-10.543 20.087,-10.057 19.506,-9.475 v1(19.476,-9.475) 19.278,-9.277 19.278,-5.375 19.168,-5.265 Display.7 15.51,-5.265 14.973,-5.802 14.165,-5.802 13.798,-5.435 13.798,-3.782 v1@14.965,-2.615
  other v1: 15.179,-2.624
PW_+5: C5.2 J1.1 U1.5 U2.1 U2.2 | length 14.1
  Top Layer w0.25: C5.2 2.845,-4.375 3.425,-4.375 ; U2.1 3.425,-4.375 ; 3.925,-4.225 U2.2 ; 3.925,-4.225 3.78,-4.371 3.429,-4.371 3.425,-4.375 ; J1.1@4.125,-8.275 4.675,-7.725 v1@4.675,-7.651 ; v1@7,-11.276 7,-10.912 7.787,-10.125 U1.5
  Bottom Layer w0.25: v1(2.9,-4.6) 2.955,-4.655 2.955,-6.205 4.35,-7.6 4.681,-7.6 4.675,-7.606 v1@4.675,-7.65 ; v1@4.35,-7.65 4.35,-8.95 6.676,-11.276 v1@7,-11.276
  other v1: 7,-11.301 4.675,-7.675
PW_+400V: C12.2 D1.1 R21.2 R27.2 | length 4.9
  Top Layer w0.25: R21.2 R27.2 ; C12.2 D1.1
  Top Layer w0.5: R27.2@27.525,-12.85 ccw(c27.525,-11.308) C12.2@28.616,-12.398
PW_BAT: Batt+1.1 C6.2 C8.2 Display.5 R2.1 R13.1 R17.1 Sound1.1 U2.3 U2.4 U3.4 U3.6 | length 58.1
  Top Layer w0.25: v1(3.675,-5.05) 5.062,-5.05 5.206,-4.906 ; U2.3 4.425,-4.6 4.9,-4.6 ; U2.4 4.9,-3.8 4.9,-4.6 ; Batt+1.1 5.694,-4.906 Batt+1.1@5.429,-4.906 ; C6.2@6.01,-1.64 5.442,-2.208 5.442,-4.892 Batt+1.1@5.429,-4.906 ; C6.2 6.229,-1.68 6.731,-1.178 8.055,-1.178 U3.6 8.175,-1 8.504,-0.671 9.273,-0.671 ; Sound1.1@7.15,-12.975 R17.1 R17.1@8.25,-12.975 ; U3.4 9.475,-0.873 9.273,-0.671 ; v1(16.376,-2.7) 16.725,-2.351 C8.2@16.725,-2.22 ; R13.1@24.6,-3.75 24.596,-3.75 24.575,-3.729 R2.1 24.354,-2.725 23.752,-2.123 23.473,-2.123 22.925,-1.575 22.45,-1.575 21.546,-0.671 9.273,-0.671 ; 4.9,-4.6 5.206,-4.906 ; 5.206,-4.906 Batt+1.1@5.429,-4.906
  Bottom Layer w0.25: v1(3.675,-5.05) 3.675,-4.488 3.16,-3.973 2.64,-3.973 2.273,-4.34 2.273,-5.315 2.552,-5.594 2.552,-6.372 3.948,-7.767 3.948,-9.117 5.515,-10.685 5.515,-10.703 6.95,-12.137 Sound1.1 ; Batt+1.1 6.237,-4.775 7.612,-3.4 10.525,-3.4 11.348,-2.577 13.853,-2.577 14.112,-2.318 14.112,-2.305 14.48,-1.937 15.613,-1.937 v1(16.376,-2.7) 16.376,-3.441 Display.5
RES#: Display.9 U4.13 | length 0.8
  Top Layer w0.152: U4.13@16.958,-6.158 U4.13 17.373,-6.625 17.425,-6.625 17.451,-6.599 v2(17.451,-6.575)
SCLK#: Display.11 U4.15 | length 5.5
  Top Layer w0.152: U4.15 16.523,-5.127 17.649,-5.127 17.891,-5.369 17.965,-5.369 18.416,-5.819 18.416,-7.533 18.134,-7.815 17.535,-7.815 17.475,-7.875 v2(17.401,-7.875)
  Bottom Layer w0.152: Display.11@17.39,-7.865 v2(17.401,-7.875)
SDIN#: Display.12 U4.17 | length 7.3
  Top Layer w0.152: U4.17 15.552,-4.744 15.8,-4.496 17.449,-4.496 18.017,-5.064 18.091,-5.064 18.721,-5.693 18.721,-7.835 18.03,-8.526 17.842,-8.526 v2(17.841,-8.528)
  Bottom Layer w0.152: v2(17.841,-8.528) 17.841,-8.509 17.9,-8.45 v2@17.965,-8.515
VIBRO: Q1.1 U4.10 | length 34.1
  Top Layer w0.152: U4.10@16.3,-7.85 16.437,-7.988 16.47,-7.988 17.489,-9.006 18.193,-9.006 19.025,-8.174 19.025,-5.7 19.252,-5.473 20.722,-5.473 21.212,-5.963 v2(21.212,-6.257) ; Q1.1 34.45,-1.682 34.45,-4 34.35,-4.1 34.3,-4.05 v1@34.227,-4.05
  Bottom Layer w0.152: v2@21.2,-6.244 v2(21.212,-6.257) 21.631,-6.257 21.824,-6.45 ; 21.825,-6.45 26.103,-10.728 33.17,-10.728 33.303,-10.595 33.303,-8.547 35.028,-6.822 35.028,-4.753 34.325,-4.05 v1@34.227,-4.05
  other v1: 34.177,-4
pads on no net: D2.1 J1.4 Joy1.5 RP1.0 RP2.0 U2.7 U3.2 U4.1 U4.2 U4.7 U4.11 U4.16 U4.22 U4.25 U4.27 U4.28 U4.29 U4.38 U4.39
copper on no net:
  other v3: 16.075,-14.2 16.908,-14.2 17.742,-14.2 18.575,-14.2 19.325,-14.2 37.45,-8.6 37.45,-7.767 37.45,-6.933 37.45,-6.1 -0.325,-4.225 -0.325,-3.392 -0.325,-2.558 -0.325,-1.725 16.05,0.3 16.883,0.3 17.717,0.3 18.55,0.3 19.35,0.3

## Polygon pours and split planes (outlines as drawn)
GND on Top Layer "Top Layer-No Net" (solid, remove dead copper, pour order 6): 0.303,-0.25 36.15,-0.25 36.15,-13.7 0.224,-13.7
GND on Bottom Layer "Top Layer-No Net" (solid, remove dead copper, pour order 4): 0.228,-0.25 36.95,-0.25 36.95,-13.675 0.149,-13.675

## Keep-outs
Keep-Out Layer:
  lines w0.1: 36.3,0.05 36.3,-2.225 37.275,-3.2 37.275,-3.225 ; 36.35,-13.95 36.35,-11.675 37.275,-10.75 37.275,-10.725 ; 14.625,0.05 ccw(c14.625,1.25) 14.625,2.45 -1.275,2.45 ccw(c-1.275,1.25) -2.475,1.25 -2.475,-0.275 ccw(c-1.275,-0.275) -0.075,-0.275 -0.075,0.05 0.6,0.05 14.625,0.05 ; 14.625,0.05 14.625,0.05 ; 37.275,-13.95 37.275,-10.05 cw(c38.475,-10.05) 39.675,-10.05 39.675,-15.15 cw(c38.475,-15.15) 38.475,-16.35 20.8,-16.35 cw(c20.8,-15.15) 20.8,-13.95 37.275,-13.95 ; 37.275,-13.95 37.275,-13.95 ; 37.275,0.05 37.275,-4.675 ccw(c38.475,-4.675) 39.675,-4.675 39.675,1.25 ccw(c38.475,1.25) 38.475,2.45 20.8,2.45 ccw(c20.8,1.25) 20.8,0.05 37.275,0.05 ; 37.275,0.05 37.275,0.05 ; 37.275,0.05 37.275,0.05 ; -2.475,-15.15 ccw(c-1.275,-15.15) -1.275,-16.35 14.625,-16.35 ccw(c14.625,-15.15) 14.625,-13.95 -0.075,-13.95 -0.075,-5.65 ccw(c-1.275,-5.65) -2.475,-5.65 -2.475,-15.15

## Other copper
Top Layer:
  pour cut-out: 33.375,-10.987 33.375,-13.66 36.13,-13.66 36.2,-13.59 36.2,-10.966
  pour cut-out: 2.625,-0.25 2.625,-2.85 0.303,-2.85 0.303,-0.25
  pour cut-out: 29.975,-13.7 29.875,-11.125 29.425,-9.121 27.925,-7.75 27.925,-5.5 ccw(c27.442,-5.982) 27.442,-5.3 26.275,-5.3 ccw(c25.846,-8.338) 24,-5.887 24,-8.448 cw(c21.461,-8.448) 23.256,-10.244 22.875,-10.625 22.537,-10.748 22.5,-13.7
Bottom Layer:
  pour cut-out: 24.675,-13.775 24.675,-10.993 ccw(c23.907,-10.993) 24.45,-10.45 22.827,-10.45 ccw(c22.827,-10.877) 22.525,-10.575 22.525,-13.509 ccw(c22.866,-13.509) 22.625,-13.75

## Silkscreen, mask and mechanical layers (free items; w line width, h text height)
Top Overlay:
  text "HW 1.1" at 5.45,-7.675 h0.8 r90
  text "Micron6" at 20.025,-9.35 h2 r90
Bottom Overlay:
  text "bat" at 4.975,-5.175 h1 r90
  text "snd" at 13.975,-13.275 h1
  text "s1 / s2" at 26.075,-13.425 h1

## Text inside footprints (layer, text, board x,y; h text height)
Display: Bottom Overlay "1" at 19.98,-1.565 h0.8; Bottom Overlay "15" at 20.21,-10.755 h0.8